# EAGLE board Cap-M (EAGLE 3.55)

No outline drawn. Coordinates in mm, seen from the top.
Copper layers used: 

## Footprints (pad centres in the part's own frame; a part is rotated, then mirrored left to right if it is on the bottom)
23 = drill 1.016 pad 1.93 octagon:  -12.7,0;  12.7,0
5*18 = drill 1.016 pad 1.93 octagon:  -10.16,0;  10.16,0
,5*23 = drill 1.016 pad 1.93 octagon:  -12.7,0;  12.7,0
,7*23 = drill 1.016 pad 1.93 octagon:  -12.7,0;  12.7,0
,7*25 = drill 1.016 pad 1.93 octagon:  -13.97,0;  13.97,0
*25 = drill 1.016 pad 1.93 octagon:  -13.97,0;  13.97,0
,5*28 = drill 1.016 pad 1.93 octagon:  -15.24,0;  15.24,0
*33 = drill 1.016 pad 2.54 octagon:  -17.78,0;  17.78,0
,5*33 = drill 1.016 pad 2.54 octagon:  -17.78,0;  17.78,0
,5*38 = drill 1.676 pad 3.81 octagon:  -21.59,0;  21.59,0
*45 = drill 1.676 pad 3.81 octagon:  -25.4,0;  25.4,0
*53 = drill 1.676 pad 3.81 octagon:  -29.21,0;  29.21,0
,5*48 = drill 1.676 pad 3.81 octagon:  -26.67,0;  26.67,0
*63 = drill 1.676 pad 3.81 octagon:  -34.29,0;  34.29,0
,5*63 = drill 1.676 pad 3.81 octagon:  -34.29,0;  34.29,0

## Placement (x,y rotation side)
9*23  [23]  45.72,246.38 0 top
9,5*18  [5*18]  17.78,246.38 0 top
10,5*23  [,5*23]  76.2,246.38 0 top
12,5*23  [,5*23]  106.68,246.38 0 top
12,7*23  [,7*23]  135.89,246.38 0 top
13,7*25  [,7*25]  166.37,246.38 0 top
14*25  [*25]  20.32,227.33 0 top
15*25  [*25]  53.34,227.33 0 top
15,5*28  [,5*28]  87.63,227.33 0 top
16,5*28  [,5*28]  123.19,227.33 0 top
19*33  [*33]  162.56,227.33 0 top
20*33  [*33]  24.13,203.2 0 top
21,5*33  [,5*33]  66.04,203.2 0 top
22*33  [*33]  107.95,203.2 0 top
23,5*38  [,5*38]  154.94,203.2 0 top
24*33  [*33]  24.13,173.99 0 top
26,5*38  [,5*38]  68.58,173.99 0 top
28*45  [*45]  120.65,173.99 0 top
31*53  [*53]  33.02,135.89 0 top
38*53  [*53]  95.25,135.89 0 top
42,5*48  [,5*48]  156.21,135.89 0 top
44*63  [*63]  38.1,87.63 0 top
48,5*63  [,5*63]  115.57,87.63 0 top
53*63  [*63]  38.1,31.75 0 top
58*63  [*63]  115.57,31.75 0 top
TQFP1  [-35SC]  0,0 0 top

## Library data of the parts
9*23 9,5*18 10,5*23 12,5*23 12,7*23 13,7*25 14*25 15*25 15,5*28 16,5*28 19*33 20*33 21,5*33 22*33 23,5*38 24*33 26,5*38 28*45 31*53 38*53 42,5*48 44*63 48,5*63 53*63 58*63 = cap-m
TQFP1 = BLATT